# EAGLE board stacka4 (EAGLE 6.5.0)
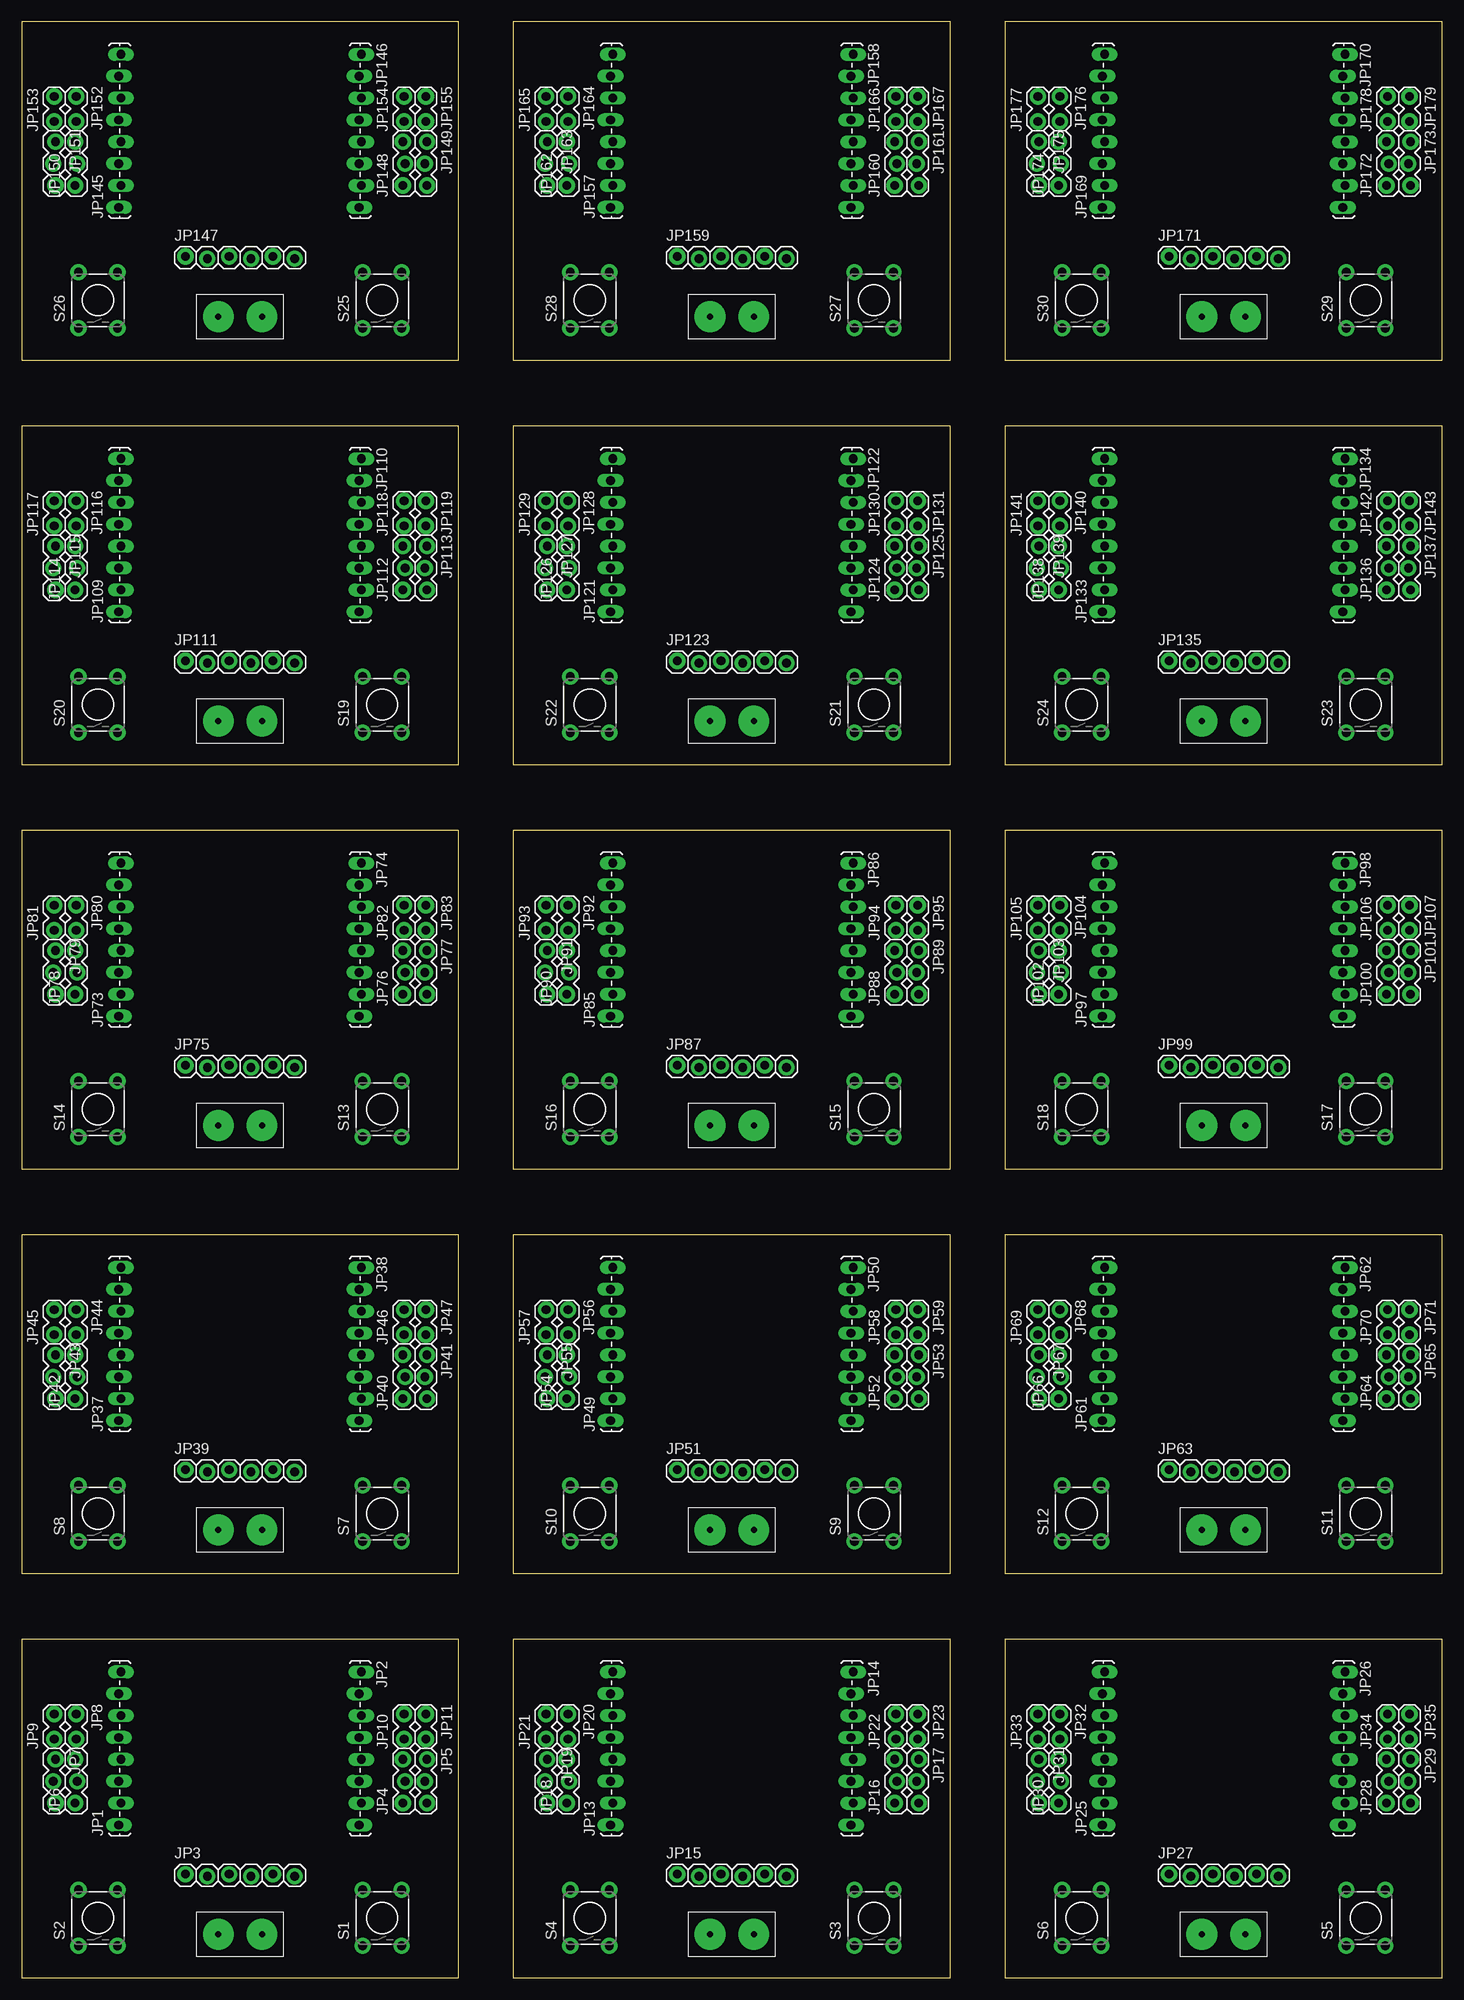
[diagram p0: board, top side]
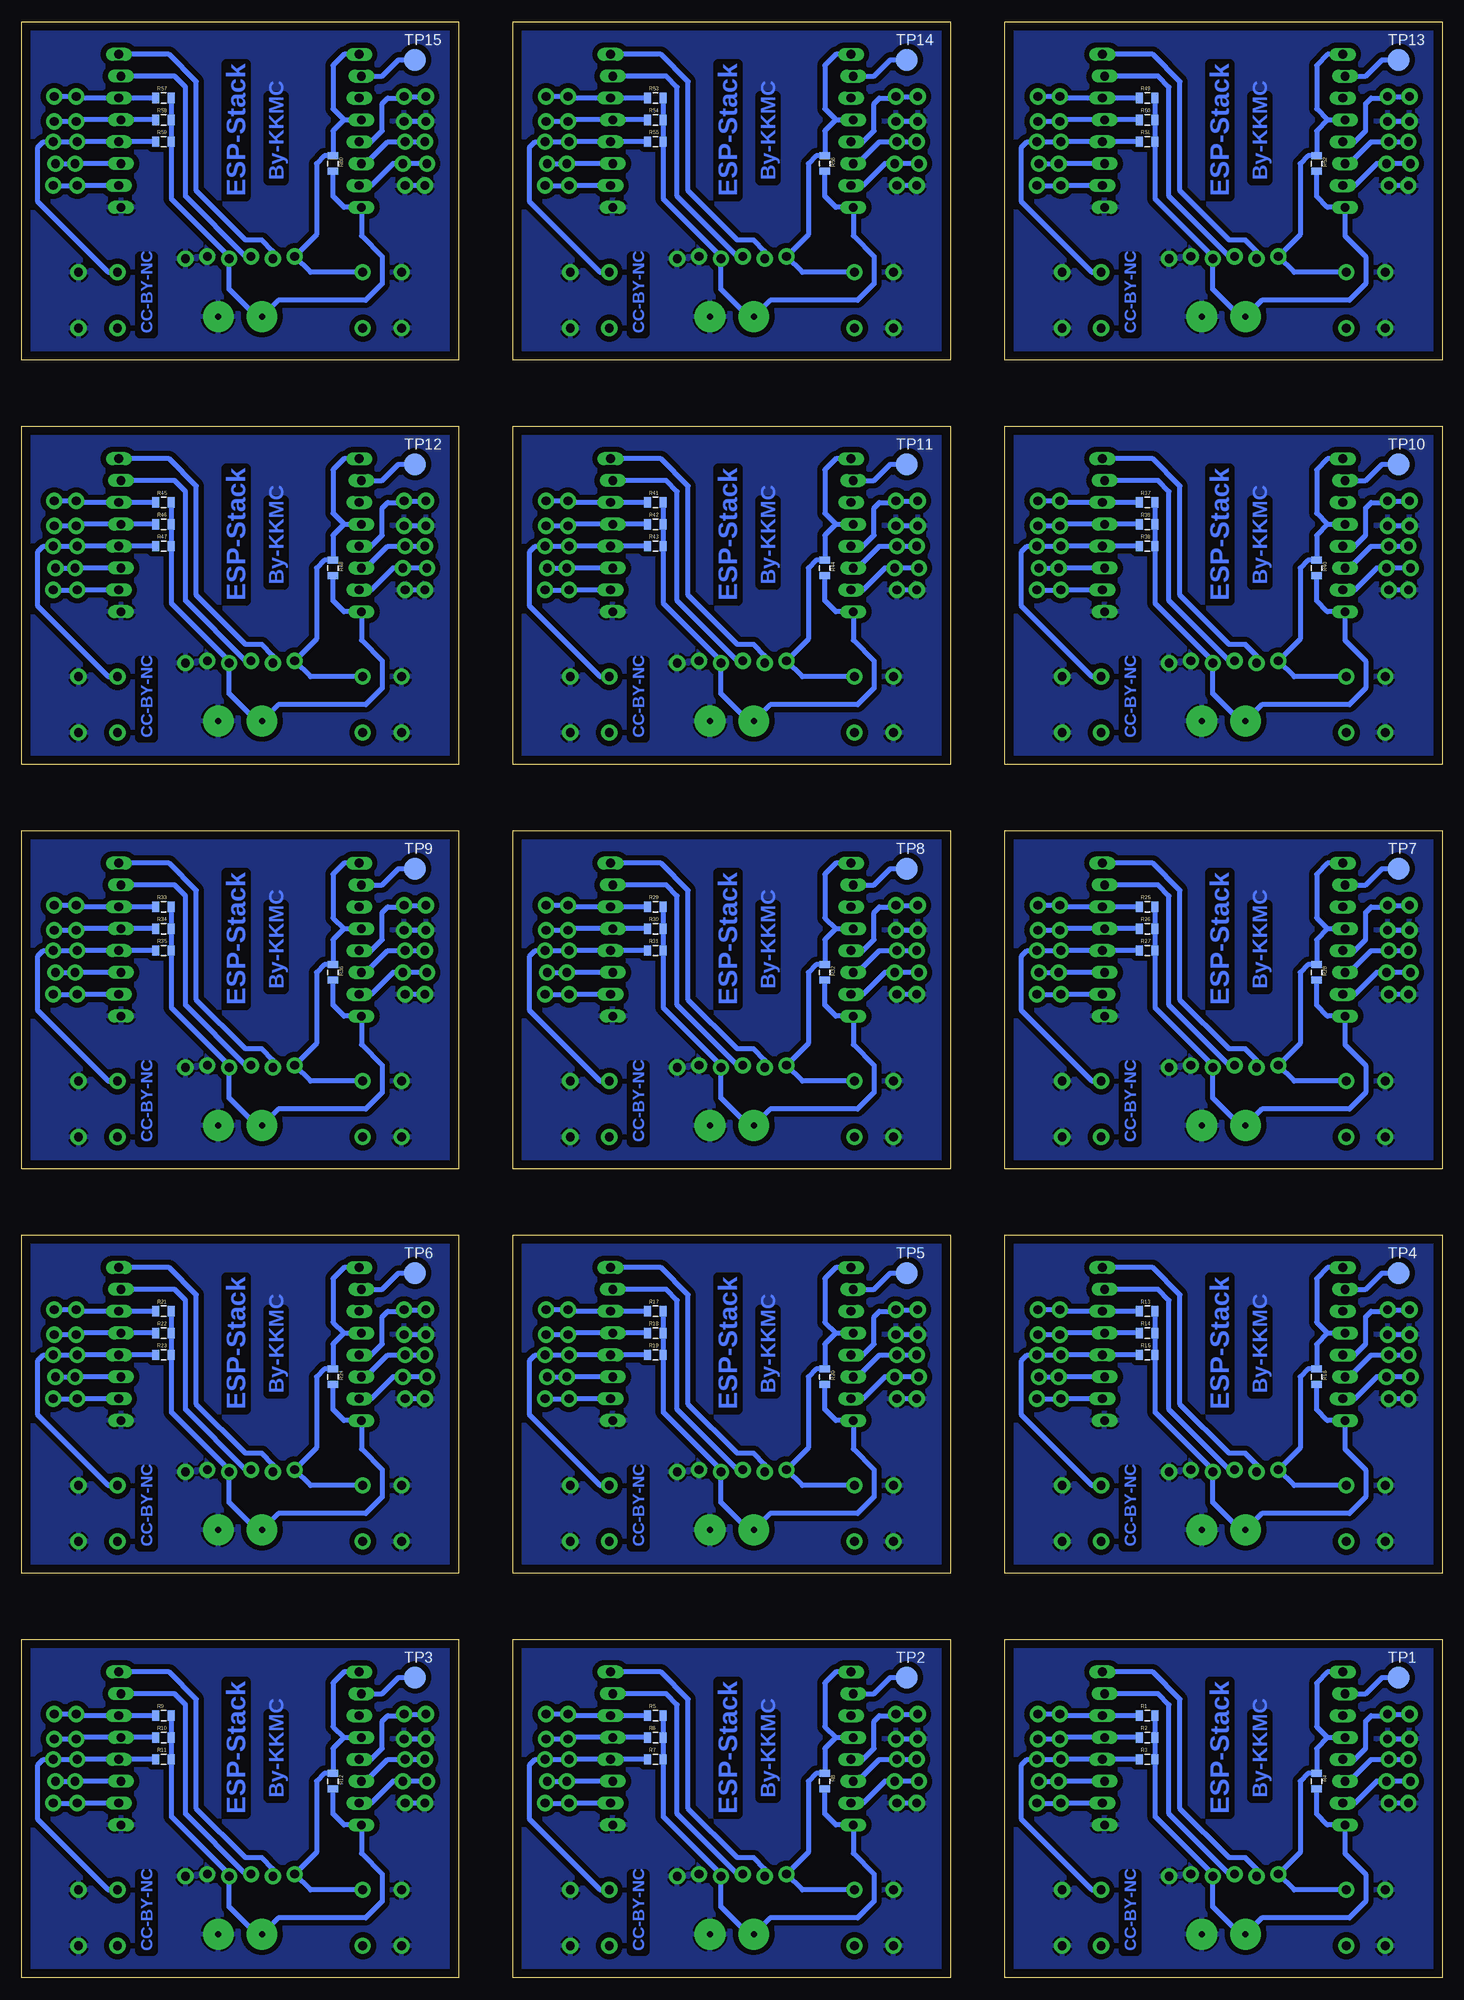
[diagram p1: board, bottom side, seen from below]

Size 165.1 x 227.33 mm. Coordinates in mm from the lower left corner, seen from the top.
Outline: 0,0 50.8,0 50.8,39.37 0,39.37 0,0
Outline: 57.15,0 107.95,0 107.95,39.37 57.15,39.37 57.15,0
Outline: 114.3,0 165.1,0 165.1,39.37 114.3,39.37 114.3,0
Outline: 0,46.99 50.8,46.99 50.8,86.36 0,86.36 0,46.99
Outline: 57.15,46.99 107.95,46.99 107.95,86.36 57.15,86.36 57.15,46.99
Outline: 114.3,46.99 165.1,46.99 165.1,86.36 114.3,86.36 114.3,46.99
Outline: 0,93.98 50.8,93.98 50.8,133.35 0,133.35 0,93.98
Outline: 57.15,93.98 107.95,93.98 107.95,133.35 57.15,133.35 57.15,93.98
Outline: 114.3,93.98 165.1,93.98 165.1,133.35 114.3,133.35 114.3,93.98
Outline: 0,140.97 50.8,140.97 50.8,180.34 0,180.34 0,140.97
Outline: 57.15,140.97 107.95,140.97 107.95,180.34 57.15,180.34 57.15,140.97
Outline: 114.3,140.97 165.1,140.97 165.1,180.34 114.3,180.34 114.3,140.97
Outline: 0,187.96 50.8,187.96 50.8,227.33 0,227.33 0,187.96
Outline: 57.15,187.96 107.95,187.96 107.95,227.33 57.15,227.33 57.15,187.96
Outline: 114.3,187.96 165.1,187.96 165.1,227.33 114.3,227.33 114.3,187.96
Copper layers (1*16): Top 0.035mm / dielectric 1.5mm / Bottom 0.035mm
Design rules "default": minimum track width 10mil, minimum drill 24mil, track to track 8mil, track to pad 8mil, pad to pad 8mil, via to via 8mil, smd to smd 8mil, copper to edge 40mil, drill to drill 8mil, minimum pad ring 10mil, minimum via ring 8mil, stop-mask expansion 4mil, vias tented up to drill 0mil, thermal gap 10mil

## Footprints (pad centres in the part's own frame; a part is rotated, then mirrored left to right if it is on the bottom)
1X08_LOCK_LONGPADS = drill 1.016 long: 1 0,0.127; 2 2.54,-0.127; 3 5.08,0.127; 4 7.62,-0.127; 5 10.16,0.127; 6 12.7,-0.127; 7 15.24,0.127; 8 17.78,-0.127
1X06_LOCK = drill 1.016 pad 1.88: 1 0,0; 2 2.54,-0.254; 3 5.08,0; 4 7.62,-0.254; 5 10.16,0; 6 12.7,-0.254
1X03_LOCK = drill 1.016 pad 1.88: 1 0,0.127; 2 2.54,-0.127; 3 5.08,0.127
1X02_LOCK = drill 1.016 pad 1.88: 1 -0.178,0; 2 2.718,0
1X02_XTRA_BIG = drill 0.7 pad 3.556: 1 -2.54,0; 2 2.54,0
0805 = smd 0.8 x 1.2: 1 -0.9,0; 2 0.9,0
TACTILE-PTH = drill 1.016 pad 1.88: 1 -3.251,2.261; 2 3.251,2.261; 3 -3.251,-2.261; 4 3.251,-2.261
B2,54 = smd 2.54 x 2.54: TP 0,0

## Placement (x,y rotation side)
E$1  [A4-35SC]  -8.26,-5.08 0 top  (outside the outline)
JP1  [1X08_LOCK_LONGPADS]  11.43,17.78 90 top
JP2  [1X08_LOCK_LONGPADS]  39.37,35.56 270 top
JP3  [1X06_LOCK]  19.05,12.06 0 top
JP4  [1X03_LOCK]  44.45,20.32 90 top
JP5  [1X03_LOCK]  46.99,25.4 270 top
JP6  [1X03_LOCK]  6.35,20.32 90 top
JP7  [1X03_LOCK]  3.81,25.4 270 top
JP8  M02LOCK  [1X02_LOCK]  6.35,30.48 270 top
JP9  M02LOCK  [1X02_LOCK]  3.81,27.94 90 top
JP10  M02LOCK  [1X02_LOCK]  44.45,27.94 90 top
JP11  M02LOCK  [1X02_LOCK]  46.99,30.48 270 top
JP12  M02PTH4  [1X02_XTRA_BIG]  25.4,5.08 0 top
JP13  [1X08_LOCK_LONGPADS]  68.58,17.78 90 top
JP14  [1X08_LOCK_LONGPADS]  96.52,35.56 270 top
JP15  [1X06_LOCK]  76.2,12.06 0 top
JP16  [1X03_LOCK]  101.6,20.32 90 top
JP17  [1X03_LOCK]  104.14,25.4 270 top
JP18  [1X03_LOCK]  63.5,20.32 90 top
JP19  [1X03_LOCK]  60.96,25.4 270 top
JP20  M02LOCK  [1X02_LOCK]  63.5,30.48 270 top
JP21  M02LOCK  [1X02_LOCK]  60.96,27.94 90 top
JP22  M02LOCK  [1X02_LOCK]  101.6,27.94 90 top
JP23  M02LOCK  [1X02_LOCK]  104.14,30.48 270 top
JP24  M02PTH4  [1X02_XTRA_BIG]  82.55,5.08 0 top
JP25  [1X08_LOCK_LONGPADS]  125.73,17.78 90 top
JP26  [1X08_LOCK_LONGPADS]  153.67,35.56 270 top
JP27  [1X06_LOCK]  133.35,12.06 0 top
JP28  [1X03_LOCK]  158.75,20.32 90 top
JP29  [1X03_LOCK]  161.29,25.4 270 top
JP30  [1X03_LOCK]  120.65,20.32 90 top
JP31  [1X03_LOCK]  118.11,25.4 270 top
JP32  M02LOCK  [1X02_LOCK]  120.65,30.48 270 top
JP33  M02LOCK  [1X02_LOCK]  118.11,27.94 90 top
JP34  M02LOCK  [1X02_LOCK]  158.75,27.94 90 top
JP35  M02LOCK  [1X02_LOCK]  161.29,30.48 270 top
JP36  M02PTH4  [1X02_XTRA_BIG]  139.7,5.08 0 top
JP37  [1X08_LOCK_LONGPADS]  11.43,64.77 90 top
JP38  [1X08_LOCK_LONGPADS]  39.37,82.55 270 top
JP39  [1X06_LOCK]  19.05,59.06 0 top
JP40  [1X03_LOCK]  44.45,67.31 90 top
JP41  [1X03_LOCK]  46.99,72.39 270 top
JP42  [1X03_LOCK]  6.35,67.31 90 top
JP43  [1X03_LOCK]  3.81,72.39 270 top
JP44  M02LOCK  [1X02_LOCK]  6.35,77.47 270 top
JP45  M02LOCK  [1X02_LOCK]  3.81,74.93 90 top
JP46  M02LOCK  [1X02_LOCK]  44.45,74.93 90 top
JP47  M02LOCK  [1X02_LOCK]  46.99,77.47 270 top
JP48  M02PTH4  [1X02_XTRA_BIG]  25.4,52.07 0 top
JP49  [1X08_LOCK_LONGPADS]  68.58,64.77 90 top
JP50  [1X08_LOCK_LONGPADS]  96.52,82.55 270 top
JP51  [1X06_LOCK]  76.2,59.06 0 top
JP52  [1X03_LOCK]  101.6,67.31 90 top
JP53  [1X03_LOCK]  104.14,72.39 270 top
JP54  [1X03_LOCK]  63.5,67.31 90 top
JP55  [1X03_LOCK]  60.96,72.39 270 top
JP56  M02LOCK  [1X02_LOCK]  63.5,77.47 270 top
JP57  M02LOCK  [1X02_LOCK]  60.96,74.93 90 top
JP58  M02LOCK  [1X02_LOCK]  101.6,74.93 90 top
JP59  M02LOCK  [1X02_LOCK]  104.14,77.47 270 top
JP60  M02PTH4  [1X02_XTRA_BIG]  82.55,52.07 0 top
JP61  [1X08_LOCK_LONGPADS]  125.73,64.77 90 top
JP62  [1X08_LOCK_LONGPADS]  153.67,82.55 270 top
JP63  [1X06_LOCK]  133.35,59.06 0 top
JP64  [1X03_LOCK]  158.75,67.31 90 top
JP65  [1X03_LOCK]  161.29,72.39 270 top
JP66  [1X03_LOCK]  120.65,67.31 90 top
JP67  [1X03_LOCK]  118.11,72.39 270 top
JP68  M02LOCK  [1X02_LOCK]  120.65,77.47 270 top
JP69  M02LOCK  [1X02_LOCK]  118.11,74.93 90 top
JP70  M02LOCK  [1X02_LOCK]  158.75,74.93 90 top
JP71  M02LOCK  [1X02_LOCK]  161.29,77.47 270 top
JP72  M02PTH4  [1X02_XTRA_BIG]  139.7,52.07 0 top
JP73  [1X08_LOCK_LONGPADS]  11.43,111.76 90 top
JP74  [1X08_LOCK_LONGPADS]  39.37,129.54 270 top
JP75  [1X06_LOCK]  19.05,106.05 0 top
JP76  [1X03_LOCK]  44.45,114.3 90 top
JP77  [1X03_LOCK]  46.99,119.38 270 top
JP78  [1X03_LOCK]  6.35,114.3 90 top
JP79  [1X03_LOCK]  3.81,119.38 270 top
JP80  M02LOCK  [1X02_LOCK]  6.35,124.46 270 top
JP81  M02LOCK  [1X02_LOCK]  3.81,121.92 90 top
JP82  M02LOCK  [1X02_LOCK]  44.45,121.92 90 top
JP83  M02LOCK  [1X02_LOCK]  46.99,124.46 270 top
JP84  M02PTH4  [1X02_XTRA_BIG]  25.4,99.06 0 top
JP85  [1X08_LOCK_LONGPADS]  68.58,111.76 90 top
JP86  [1X08_LOCK_LONGPADS]  96.52,129.54 270 top
JP87  [1X06_LOCK]  76.2,106.05 0 top
JP88  [1X03_LOCK]  101.6,114.3 90 top
JP89  [1X03_LOCK]  104.14,119.38 270 top
JP90  [1X03_LOCK]  63.5,114.3 90 top
JP91  [1X03_LOCK]  60.96,119.38 270 top
JP92  M02LOCK  [1X02_LOCK]  63.5,124.46 270 top
JP93  M02LOCK  [1X02_LOCK]  60.96,121.92 90 top
JP94  M02LOCK  [1X02_LOCK]  101.6,121.92 90 top
JP95  M02LOCK  [1X02_LOCK]  104.14,124.46 270 top
JP96  M02PTH4  [1X02_XTRA_BIG]  82.55,99.06 0 top
JP97  [1X08_LOCK_LONGPADS]  125.73,111.76 90 top
JP98  [1X08_LOCK_LONGPADS]  153.67,129.54 270 top
JP99  [1X06_LOCK]  133.35,106.05 0 top
JP100  [1X03_LOCK]  158.75,114.3 90 top
JP101  [1X03_LOCK]  161.29,119.38 270 top
JP102  [1X03_LOCK]  120.65,114.3 90 top
JP103  [1X03_LOCK]  118.11,119.38 270 top
JP104  M02LOCK  [1X02_LOCK]  120.65,124.46 270 top
JP105  M02LOCK  [1X02_LOCK]  118.11,121.92 90 top
JP106  M02LOCK  [1X02_LOCK]  158.75,121.92 90 top
JP107  M02LOCK  [1X02_LOCK]  161.29,124.46 270 top
JP108  M02PTH4  [1X02_XTRA_BIG]  139.7,99.06 0 top
JP109  [1X08_LOCK_LONGPADS]  11.43,158.75 90 top
JP110  [1X08_LOCK_LONGPADS]  39.37,176.53 270 top
JP111  [1X06_LOCK]  19.05,153.03 0 top
JP112  [1X03_LOCK]  44.45,161.29 90 top
JP113  [1X03_LOCK]  46.99,166.37 270 top
JP114  [1X03_LOCK]  6.35,161.29 90 top
JP115  [1X03_LOCK]  3.81,166.37 270 top
JP116  M02LOCK  [1X02_LOCK]  6.35,171.45 270 top
JP117  M02LOCK  [1X02_LOCK]  3.81,168.91 90 top
JP118  M02LOCK  [1X02_LOCK]  44.45,168.91 90 top
JP119  M02LOCK  [1X02_LOCK]  46.99,171.45 270 top
JP120  M02PTH4  [1X02_XTRA_BIG]  25.4,146.05 0 top
JP121  [1X08_LOCK_LONGPADS]  68.58,158.75 90 top
JP122  [1X08_LOCK_LONGPADS]  96.52,176.53 270 top
JP123  [1X06_LOCK]  76.2,153.03 0 top
JP124  [1X03_LOCK]  101.6,161.29 90 top
JP125  [1X03_LOCK]  104.14,166.37 270 top
JP126  [1X03_LOCK]  63.5,161.29 90 top
JP127  [1X03_LOCK]  60.96,166.37 270 top
JP128  M02LOCK  [1X02_LOCK]  63.5,171.45 270 top
JP129  M02LOCK  [1X02_LOCK]  60.96,168.91 90 top
JP130  M02LOCK  [1X02_LOCK]  101.6,168.91 90 top
JP131  M02LOCK  [1X02_LOCK]  104.14,171.45 270 top
JP132  M02PTH4  [1X02_XTRA_BIG]  82.55,146.05 0 top
JP133  [1X08_LOCK_LONGPADS]  125.73,158.75 90 top
JP134  [1X08_LOCK_LONGPADS]  153.67,176.53 270 top
JP135  [1X06_LOCK]  133.35,153.03 0 top
JP136  [1X03_LOCK]  158.75,161.29 90 top
JP137  [1X03_LOCK]  161.29,166.37 270 top
JP138  [1X03_LOCK]  120.65,161.29 90 top
JP139  [1X03_LOCK]  118.11,166.37 270 top
JP140  M02LOCK  [1X02_LOCK]  120.65,171.45 270 top
JP141  M02LOCK  [1X02_LOCK]  118.11,168.91 90 top
JP142  M02LOCK  [1X02_LOCK]  158.75,168.91 90 top
JP143  M02LOCK  [1X02_LOCK]  161.29,171.45 270 top
JP144  M02PTH4  [1X02_XTRA_BIG]  139.7,146.05 0 top
JP145  [1X08_LOCK_LONGPADS]  11.43,205.74 90 top
JP146  [1X08_LOCK_LONGPADS]  39.37,223.52 270 top
JP147  [1X06_LOCK]  19.05,200.02 0 top
JP148  [1X03_LOCK]  44.45,208.28 90 top
JP149  [1X03_LOCK]  46.99,213.36 270 top
JP150  [1X03_LOCK]  6.35,208.28 90 top
JP151  [1X03_LOCK]  3.81,213.36 270 top
JP152  M02LOCK  [1X02_LOCK]  6.35,218.44 270 top
JP153  M02LOCK  [1X02_LOCK]  3.81,215.9 90 top
JP154  M02LOCK  [1X02_LOCK]  44.45,215.9 90 top
JP155  M02LOCK  [1X02_LOCK]  46.99,218.44 270 top
JP156  M02PTH4  [1X02_XTRA_BIG]  25.4,193.04 0 top
JP157  [1X08_LOCK_LONGPADS]  68.58,205.74 90 top
JP158  [1X08_LOCK_LONGPADS]  96.52,223.52 270 top
JP159  [1X06_LOCK]  76.2,200.02 0 top
JP160  [1X03_LOCK]  101.6,208.28 90 top
JP161  [1X03_LOCK]  104.14,213.36 270 top
JP162  [1X03_LOCK]  63.5,208.28 90 top
JP163  [1X03_LOCK]  60.96,213.36 270 top
JP164  M02LOCK  [1X02_LOCK]  63.5,218.44 270 top
JP165  M02LOCK  [1X02_LOCK]  60.96,215.9 90 top
JP166  M02LOCK  [1X02_LOCK]  101.6,215.9 90 top
JP167  M02LOCK  [1X02_LOCK]  104.14,218.44 270 top
JP168  M02PTH4  [1X02_XTRA_BIG]  82.55,193.04 0 top
JP169  [1X08_LOCK_LONGPADS]  125.73,205.74 90 top
JP170  [1X08_LOCK_LONGPADS]  153.67,223.52 270 top
JP171  [1X06_LOCK]  133.35,200.02 0 top
JP172  [1X03_LOCK]  158.75,208.28 90 top
JP173  [1X03_LOCK]  161.29,213.36 270 top
JP174  [1X03_LOCK]  120.65,208.28 90 top
JP175  [1X03_LOCK]  118.11,213.36 270 top
JP176  M02LOCK  [1X02_LOCK]  120.65,218.44 270 top
JP177  M02LOCK  [1X02_LOCK]  118.11,215.9 90 top
JP178  M02LOCK  [1X02_LOCK]  158.75,215.9 90 top
JP179  M02LOCK  [1X02_LOCK]  161.29,218.44 270 top
JP180  M02PTH4  [1X02_XTRA_BIG]  139.7,193.04 0 top
R1  [0805]  34.29,30.48 0 bottom
R2  [0805]  34.29,27.94 0 bottom
R3  [0805]  34.29,25.4 0 bottom
R4  [0805]  14.6,22.86 270 bottom
R5  [0805]  91.44,30.48 0 bottom
R6  [0805]  91.44,27.94 0 bottom
R7  [0805]  91.44,25.4 0 bottom
R8  [0805]  71.76,22.86 270 bottom
R9  [0805]  148.59,30.48 0 bottom
R10  [0805]  148.59,27.94 0 bottom
R11  [0805]  148.59,25.4 0 bottom
R12  [0805]  128.91,22.86 270 bottom
R13  [0805]  34.29,77.47 0 bottom
R14  [0805]  34.29,74.93 0 bottom
R15  [0805]  34.29,72.39 0 bottom
R16  [0805]  14.6,69.85 270 bottom
R17  [0805]  91.44,77.47 0 bottom
R18  [0805]  91.44,74.93 0 bottom
R19  [0805]  91.44,72.39 0 bottom
R20  [0805]  71.76,69.85 270 bottom
R21  [0805]  148.59,77.47 0 bottom
R22  [0805]  148.59,74.93 0 bottom
R23  [0805]  148.59,72.39 0 bottom
R24  [0805]  128.91,69.85 270 bottom
R25  [0805]  34.29,124.46 0 bottom
R26  [0805]  34.29,121.92 0 bottom
R27  [0805]  34.29,119.38 0 bottom
R28  [0805]  14.6,116.84 270 bottom
R29  [0805]  91.44,124.46 0 bottom
R30  [0805]  91.44,121.92 0 bottom
R31  [0805]  91.44,119.38 0 bottom
R32  [0805]  71.76,116.84 270 bottom
R33  [0805]  148.59,124.46 0 bottom
R34  [0805]  148.59,121.92 0 bottom
R35  [0805]  148.59,119.38 0 bottom
R36  [0805]  128.91,116.84 270 bottom
R37  [0805]  34.29,171.45 0 bottom
R38  [0805]  34.29,168.91 0 bottom
R39  [0805]  34.29,166.37 0 bottom
R40  [0805]  14.6,163.83 270 bottom
R41  [0805]  91.44,171.45 0 bottom
R42  [0805]  91.44,168.91 0 bottom
R43  [0805]  91.44,166.37 0 bottom
R44  [0805]  71.76,163.83 270 bottom
R45  [0805]  148.59,171.45 0 bottom
R46  [0805]  148.59,168.91 0 bottom
R47  [0805]  148.59,166.37 0 bottom
R48  [0805]  128.91,163.83 270 bottom
R49  [0805]  34.29,218.44 0 bottom
R50  [0805]  34.29,215.9 0 bottom
R51  [0805]  34.29,213.36 0 bottom
R52  [0805]  14.6,210.82 270 bottom
R53  [0805]  91.44,218.44 0 bottom
R54  [0805]  91.44,215.9 0 bottom
R55  [0805]  91.44,213.36 0 bottom
R56  [0805]  71.76,210.82 270 bottom
R57  [0805]  148.59,218.44 0 bottom
R58  [0805]  148.59,215.9 0 bottom
R59  [0805]  148.59,213.36 0 bottom
R60  [0805]  128.91,210.82 270 bottom
S1  [TACTILE-PTH]  41.91,6.98 90 top
S2  [TACTILE-PTH]  8.89,6.98 90 top
S3  [TACTILE-PTH]  99.06,6.98 90 top
S4  [TACTILE-PTH]  66.04,6.98 90 top
S5  [TACTILE-PTH]  156.21,6.98 90 top
S6  [TACTILE-PTH]  123.19,6.98 90 top
S7  [TACTILE-PTH]  41.91,53.98 90 top
S8  [TACTILE-PTH]  8.89,53.98 90 top
S9  [TACTILE-PTH]  99.06,53.98 90 top
S10  [TACTILE-PTH]  66.04,53.98 90 top
S11  [TACTILE-PTH]  156.21,53.98 90 top
S12  [TACTILE-PTH]  123.19,53.98 90 top
S13  [TACTILE-PTH]  41.91,100.97 90 top
S14  [TACTILE-PTH]  8.89,100.97 90 top
S15  [TACTILE-PTH]  99.06,100.97 90 top
S16  [TACTILE-PTH]  66.04,100.97 90 top
S17  [TACTILE-PTH]  156.21,100.97 90 top
S18  [TACTILE-PTH]  123.19,100.97 90 top
S19  [TACTILE-PTH]  41.91,147.95 90 top
S20  [TACTILE-PTH]  8.89,147.95 90 top
S21  [TACTILE-PTH]  99.06,147.95 90 top
S22  [TACTILE-PTH]  66.04,147.95 90 top
S23  [TACTILE-PTH]  156.21,147.95 90 top
S24  [TACTILE-PTH]  123.19,147.95 90 top
S25  [TACTILE-PTH]  41.91,194.94 90 top
S26  [TACTILE-PTH]  8.89,194.94 90 top
S27  [TACTILE-PTH]  99.06,194.94 90 top
S28  [TACTILE-PTH]  66.04,194.94 90 top
S29  [TACTILE-PTH]  156.21,194.94 90 top
S30  [TACTILE-PTH]  123.19,194.94 90 top
TP1  TPB2,54  [B2,54]  5.08,34.93 0 bottom
TP2  TPB2,54  [B2,54]  62.23,34.93 0 bottom
TP3  TPB2,54  [B2,54]  119.38,34.93 0 bottom
TP4  TPB2,54  [B2,54]  5.08,81.92 0 bottom
TP5  TPB2,54  [B2,54]  62.23,81.92 0 bottom
TP6  TPB2,54  [B2,54]  119.38,81.92 0 bottom
TP7  TPB2,54  [B2,54]  5.08,128.91 0 bottom
TP8  TPB2,54  [B2,54]  62.23,128.91 0 bottom
TP9  TPB2,54  [B2,54]  119.38,128.91 0 bottom
TP10  TPB2,54  [B2,54]  5.08,175.89 0 bottom
TP11  TPB2,54  [B2,54]  62.23,175.89 0 bottom
TP12  TPB2,54  [B2,54]  119.38,175.89 0 bottom
TP13  TPB2,54  [B2,54]  5.08,222.88 0 bottom
TP14  TPB2,54  [B2,54]  62.23,222.88 0 bottom
TP15  TPB2,54  [B2,54]  119.38,222.88 0 bottom

## Library data of the parts
E$1 = frames
JP1-JP180 = SparkFun-Connectors
R1-R60 = SparkFun-Passives
S1-S30 = SparkFun-Electromechanical
TP1-TP15 = testpad

## Nets
ADC: JP1.7 TP1.TP
ADC1: JP13.7 TP2.TP
ADC2: JP25.7 TP3.TP
ADC3: JP37.7 TP4.TP
ADC4: JP49.7 TP5.TP
ADC5: JP61.7 TP6.TP
ADC6: JP73.7 TP7.TP
ADC7: JP85.7 TP8.TP
ADC8: JP97.7 TP9.TP
ADC9: JP109.7 TP10.TP
ADC10: JP121.7 TP11.TP
ADC11: JP133.7 TP12.TP
ADC12: JP145.7 TP13.TP
ADC13: JP157.7 TP14.TP
ADC14: JP169.7 TP15.TP
CH_PD: JP1.6
CH_PD1: JP13.6
CH_PD2: JP25.6
CH_PD3: JP37.6
CH_PD4: JP49.6
CH_PD5: JP61.6
CH_PD6: JP73.6
CH_PD7: JP85.6
CH_PD8: JP97.6
CH_PD9: JP109.6
CH_PD10: JP121.6
CH_PD11: JP133.6
CH_PD12: JP145.6
CH_PD13: JP157.6
CH_PD14: JP169.6
GND: JP2.8 JP3.5 JP3.6 JP6.1 JP7.3 JP8.2 JP9.1 JP12.2 S1.3 S1.4 S2.1 S2.2
GND1: JP14.8 JP15.5 JP15.6 JP18.1 JP19.3 JP20.2 JP21.1 JP24.2 S3.3 S3.4 S4.1 S4.2
GND2: JP26.8 JP27.5 JP27.6 JP30.1 JP31.3 JP32.2 JP33.1 JP36.2 S5.3 S5.4 S6.1 S6.2
GND3: JP38.8 JP39.5 JP39.6 JP42.1 JP43.3 JP44.2 JP45.1 JP48.2 S7.3 S7.4 S8.1 S8.2
GND4: JP50.8 JP51.5 JP51.6 JP54.1 JP55.3 JP56.2 JP57.1 JP60.2 S9.3 S9.4 S10.1 S10.2
GND5: JP62.8 JP63.5 JP63.6 JP66.1 JP67.3 JP68.2 JP69.1 JP72.2 S11.3 S11.4 S12.1 S12.2
GND6: JP74.8 JP75.5 JP75.6 JP78.1 JP79.3 JP80.2 JP81.1 JP84.2 S13.3 S13.4 S14.1 S14.2
GND7: JP86.8 JP87.5 JP87.6 JP90.1 JP91.3 JP92.2 JP93.1 JP96.2 S15.3 S15.4 S16.1 S16.2
GND8: JP98.8 JP99.5 JP99.6 JP102.1 JP103.3 JP104.2 JP105.1 JP108.2 S17.3 S17.4 S18.1 S18.2
GND9: JP110.8 JP111.5 JP111.6 JP114.1 JP115.3 JP116.2 JP117.1 JP120.2 S19.3 S19.4 S20.1 S20.2
GND10: JP122.8 JP123.5 JP123.6 JP126.1 JP127.3 JP128.2 JP129.1 JP132.2 S21.3 S21.4 S22.1 S22.2
GND11: JP134.8 JP135.5 JP135.6 JP138.1 JP139.3 JP140.2 JP141.1 JP144.2 S23.3 S23.4 S24.1 S24.2
GND12: JP146.8 JP147.5 JP147.6 JP150.1 JP151.3 JP152.2 JP153.1 JP156.2 S25.3 S25.4 S26.1 S26.2
GND13: JP158.8 JP159.5 JP159.6 JP162.1 JP163.3 JP164.2 JP165.1 JP168.2 S27.3 S27.4 S28.1 S28.2
GND14: JP170.8 JP171.5 JP171.6 JP174.1 JP175.3 JP176.2 JP177.1 JP180.2 S29.3 S29.4 S30.1 S30.2
GPIO0: JP2.5 JP4.3 JP5.1 R3.1 S1.2
GPIO1: JP13.4 JP20.1 JP21.2
GPIO2: JP2.6 JP4.2 JP5.2
GPIO3: JP13.3 JP18.3 JP19.1
GPIO4: JP2.4 JP10.1 JP11.2 R2.1
GPIO5: JP2.3 JP10.2 JP11.1 R1.1
GPIO6: JP13.2 JP18.2 JP19.2
GPIO7: JP14.7 JP16.1 JP17.3
GPIO8: JP14.6 JP16.2 JP17.2
GPIO9: JP14.5 JP16.3 JP17.1 R7.1 S3.2
GPIO10: JP14.4 JP22.1 JP23.2 R6.1
GPIO11: JP14.3 JP22.2 JP23.1 R5.1
GPIO12: JP1.3 JP6.3 JP7.1
GPIO13: JP1.2 JP6.2 JP7.2
GPIO14: JP1.4 JP8.1 JP9.2
GPIO15: JP2.7 JP4.1 JP5.3
GPIO16: JP25.4 JP32.1 JP33.2
GPIO17: JP25.3 JP30.3 JP31.1
GPIO18: JP25.2 JP30.2 JP31.2
GPIO19: JP26.7 JP28.1 JP29.3
GPIO20: JP26.6 JP28.2 JP29.2
GPIO21: JP26.5 JP28.3 JP29.1 R11.1 S5.2
GPIO22: JP26.4 JP34.1 JP35.2 R10.1
GPIO23: JP26.3 JP34.2 JP35.1 R9.1
GPIO24: JP37.4 JP44.1 JP45.2
GPIO25: JP37.3 JP42.3 JP43.1
GPIO26: JP37.2 JP42.2 JP43.2
GPIO27: JP38.7 JP40.1 JP41.3
GPIO28: JP38.6 JP40.2 JP41.2
GPIO29: JP38.5 JP40.3 JP41.1 R15.1 S7.2
GPIO30: JP38.4 JP46.1 JP47.2 R14.1
GPIO31: JP38.3 JP46.2 JP47.1 R13.1
GPIO32: JP49.4 JP56.1 JP57.2
GPIO33: JP49.3 JP54.3 JP55.1
GPIO34: JP49.2 JP54.2 JP55.2
GPIO35: JP50.7 JP52.1 JP53.3
GPIO36: JP50.6 JP52.2 JP53.2
GPIO37: JP50.5 JP52.3 JP53.1 R19.1 S9.2
GPIO38: JP50.4 JP58.1 JP59.2 R18.1
GPIO39: JP50.3 JP58.2 JP59.1 R17.1
GPIO40: JP61.4 JP68.1 JP69.2
GPIO41: JP61.3 JP66.3 JP67.1
GPIO42: JP61.2 JP66.2 JP67.2
GPIO43: JP62.7 JP64.1 JP65.3
GPIO44: JP62.6 JP64.2 JP65.2
GPIO45: JP62.5 JP64.3 JP65.1 R23.1 S11.2
GPIO46: JP62.4 JP70.1 JP71.2 R22.1
GPIO47: JP62.3 JP70.2 JP71.1 R21.1
GPIO48: JP73.4 JP80.1 JP81.2
GPIO49: JP73.3 JP78.3 JP79.1
GPIO50: JP73.2 JP78.2 JP79.2
GPIO51: JP74.7 JP76.1 JP77.3
GPIO52: JP74.6 JP76.2 JP77.2
GPIO53: JP74.5 JP76.3 JP77.1 R27.1 S13.2
GPIO54: JP74.4 JP82.1 JP83.2 R26.1
GPIO55: JP74.3 JP82.2 JP83.1 R25.1
GPIO56: JP85.4 JP92.1 JP93.2
GPIO57: JP85.3 JP90.3 JP91.1
GPIO58: JP85.2 JP90.2 JP91.2
GPIO59: JP86.7 JP88.1 JP89.3
GPIO60: JP86.6 JP88.2 JP89.2
GPIO61: JP86.5 JP88.3 JP89.1 R31.1 S15.2
GPIO62: JP86.4 JP94.1 JP95.2 R30.1
GPIO63: JP86.3 JP94.2 JP95.1 R29.1
GPIO64: JP97.4 JP104.1 JP105.2
GPIO65: JP97.3 JP102.3 JP103.1
GPIO66: JP97.2 JP102.2 JP103.2
GPIO67: JP98.7 JP100.1 JP101.3
GPIO68: JP98.6 JP100.2 JP101.2
GPIO69: JP98.5 JP100.3 JP101.1 R35.1 S17.2
GPIO70: JP98.4 JP106.1 JP107.2 R34.1
GPIO71: JP98.3 JP106.2 JP107.1 R33.1
GPIO72: JP109.4 JP116.1 JP117.2
GPIO73: JP109.3 JP114.3 JP115.1
GPIO74: JP109.2 JP114.2 JP115.2
GPIO75: JP110.7 JP112.1 JP113.3
GPIO76: JP110.6 JP112.2 JP113.2
GPIO77: JP110.5 JP112.3 JP113.1 R39.1 S19.2
GPIO78: JP110.4 JP118.1 JP119.2 R38.1
GPIO79: JP110.3 JP118.2 JP119.1 R37.1
GPIO80: JP121.4 JP128.1 JP129.2
GPIO81: JP121.3 JP126.3 JP127.1
GPIO82: JP121.2 JP126.2 JP127.2
GPIO83: JP122.7 JP124.1 JP125.3
GPIO84: JP122.6 JP124.2 JP125.2
GPIO85: JP122.5 JP124.3 JP125.1 R43.1 S21.2
GPIO86: JP122.4 JP130.1 JP131.2 R42.1
GPIO87: JP122.3 JP130.2 JP131.1 R41.1
GPIO88: JP133.4 JP140.1 JP141.2
GPIO89: JP133.3 JP138.3 JP139.1
GPIO90: JP133.2 JP138.2 JP139.2
GPIO91: JP134.7 JP136.1 JP137.3
GPIO92: JP134.6 JP136.2 JP137.2
GPIO93: JP134.5 JP136.3 JP137.1 R47.1 S23.2
GPIO94: JP134.4 JP142.1 JP143.2 R46.1
GPIO95: JP134.3 JP142.2 JP143.1 R45.1
GPIO96: JP145.4 JP152.1 JP153.2
GPIO97: JP145.3 JP150.3 JP151.1
GPIO98: JP145.2 JP150.2 JP151.2
GPIO99: JP146.7 JP148.1 JP149.3
GPIO100: JP146.6 JP148.2 JP149.2
GPIO101: JP146.5 JP148.3 JP149.1 R51.1 S25.2
GPIO102: JP146.4 JP154.1 JP155.2 R50.1
GPIO103: JP146.3 JP154.2 JP155.1 R49.1
GPIO104: JP157.4 JP164.1 JP165.2
GPIO105: JP157.3 JP162.3 JP163.1
GPIO106: JP157.2 JP162.2 JP163.2
GPIO107: JP158.7 JP160.1 JP161.3
GPIO108: JP158.6 JP160.2 JP161.2
GPIO109: JP158.5 JP160.3 JP161.1 R55.1 S27.2
GPIO110: JP158.4 JP166.1 JP167.2 R54.1
GPIO111: JP158.3 JP166.2 JP167.1 R53.1
GPIO112: JP169.4 JP176.1 JP177.2
GPIO113: JP169.3 JP174.3 JP175.1
GPIO114: JP169.2 JP174.2 JP175.2
GPIO115: JP170.7 JP172.1 JP173.3
GPIO116: JP170.6 JP172.2 JP173.2
GPIO117: JP170.5 JP172.3 JP173.1 R59.1 S29.2
GPIO118: JP170.4 JP178.1 JP179.2 R58.1
GPIO119: JP170.3 JP178.2 JP179.1 R57.1
REST: JP1.5 JP1.8 JP3.1 R4.1 S2.4
REST1: JP13.5 JP13.8 JP15.1 R8.1 S4.4
REST2: JP25.5 JP25.8 JP27.1 R12.1 S6.4
REST3: JP37.5 JP37.8 JP39.1 R16.1 S8.4
REST4: JP49.5 JP49.8 JP51.1 R20.1 S10.4
REST5: JP61.5 JP61.8 JP63.1 R24.1 S12.4
REST6: JP73.5 JP73.8 JP75.1 R28.1 S14.4
REST7: JP85.5 JP85.8 JP87.1 R32.1 S16.4
REST8: JP97.5 JP97.8 JP99.1 R36.1 S18.4
REST9: JP109.5 JP109.8 JP111.1 R40.1 S20.4
REST10: JP121.5 JP121.8 JP123.1 R44.1 S22.4
REST11: JP133.5 JP133.8 JP135.1 R48.1 S24.4
REST12: JP145.5 JP145.8 JP147.1 R52.1 S26.4
REST13: JP157.5 JP157.8 JP159.1 R56.1 S28.4
REST14: JP169.5 JP169.8 JP171.1 R60.1 S30.4
RXD: JP2.2 JP3.3
RXD1: JP14.2 JP15.3
RXD2: JP26.2 JP27.3
RXD3: JP38.2 JP39.3
RXD4: JP50.2 JP51.3
RXD5: JP62.2 JP63.3
RXD6: JP74.2 JP75.3
RXD7: JP86.2 JP87.3
RXD8: JP98.2 JP99.3
RXD9: JP110.2 JP111.3
RXD10: JP122.2 JP123.3
RXD11: JP134.2 JP135.3
RXD12: JP146.2 JP147.3
RXD13: JP158.2 JP159.3
RXD14: JP170.2 JP171.3
TXD: JP2.1 JP3.2
TXD1: JP14.1 JP15.2
TXD2: JP26.1 JP27.2
TXD3: JP38.1 JP39.2
TXD4: JP50.1 JP51.2
TXD5: JP62.1 JP63.2
TXD6: JP74.1 JP75.2
TXD7: JP86.1 JP87.2
TXD8: JP98.1 JP99.2
TXD9: JP110.1 JP111.2
TXD10: JP122.1 JP123.2
TXD11: JP134.1 JP135.2
TXD12: JP146.1 JP147.2
TXD13: JP158.1 JP159.2
TXD14: JP170.1 JP171.2
VCC: JP1.1 JP3.4 JP12.1 R1.2 R2.2 R3.2 R4.2
VCC1: JP13.1 JP15.4 JP24.1 R5.2 R6.2 R7.2 R8.2
VCC2: JP25.1 JP27.4 JP36.1 R9.2 R10.2 R11.2 R12.2
VCC3: JP37.1 JP39.4 JP48.1 R13.2 R14.2 R15.2 R16.2
VCC4: JP49.1 JP51.4 JP60.1 R17.2 R18.2 R19.2 R20.2
VCC5: JP61.1 JP63.4 JP72.1 R21.2 R22.2 R23.2 R24.2
VCC6: JP73.1 JP75.4 JP84.1 R25.2 R26.2 R27.2 R28.2
VCC7: JP85.1 JP87.4 JP96.1 R29.2 R30.2 R31.2 R32.2
VCC8: JP97.1 JP99.4 JP108.1 R33.2 R34.2 R35.2 R36.2
VCC9: JP109.1 JP111.4 JP120.1 R37.2 R38.2 R39.2 R40.2
VCC10: JP121.1 JP123.4 JP132.1 R41.2 R42.2 R43.2 R44.2
VCC11: JP133.1 JP135.4 JP144.1 R45.2 R46.2 R47.2 R48.2
VCC12: JP145.1 JP147.4 JP156.1 R49.2 R50.2 R51.2 R52.2
VCC13: JP157.1 JP159.4 JP168.1 R53.2 R54.2 R55.2 R56.2
VCC14: JP169.1 JP171.4 JP180.1 R57.2 R58.2 R59.2 R60.2

## Tracks (layer width: path | path; a pad name or v marks a point on that pad's centre or on a via)
ADC
  Bottom 0.61: JP1.7 8.89,33.02 6.98,34.93 TP1.TP
ADC1
  Bottom 0.61: JP13.7 66.04,33.02 64.14,34.93 TP2.TP
ADC2
  Bottom 0.61: JP25.7 123.19,33.02 121.28,34.93 TP3.TP
ADC3
  Bottom 0.61: JP37.7 8.89,80.01 6.98,81.92 TP4.TP
ADC4
  Bottom 0.61: JP49.7 66.04,80.01 64.14,81.92 TP5.TP
ADC5
  Bottom 0.61: JP61.7 123.19,80.01 121.28,81.92 TP6.TP
ADC6
  Bottom 0.61: JP73.7 8.89,127 6.98,128.91 TP7.TP
ADC7
  Bottom 0.61: JP85.7 66.04,127 64.14,128.91 TP8.TP
ADC8
  Bottom 0.61: JP97.7 123.19,127 121.28,128.91 TP9.TP
ADC9
  Bottom 0.61: JP109.7 8.89,173.99 6.98,175.89 TP10.TP
ADC10
  Bottom 0.61: JP121.7 66.04,173.99 64.14,175.89 TP11.TP
ADC11
  Bottom 0.61: JP133.7 123.19,173.99 121.28,175.89 TP12.TP
ADC12
  Bottom 0.61: JP145.7 8.89,220.98 6.98,222.88 TP13.TP
ADC13
  Bottom 0.61: JP157.7 66.04,220.98 64.14,222.88 TP14.TP
ADC14
  Bottom 0.61: JP169.7 123.19,220.98 121.28,222.88 TP15.TP
GND
  Bottom 0.61: JP8.2 JP9.1 | JP7.3 JP6.1
  pour Bottom (isolate 0.61): 0,39.37 50.8,39.37 50.8,0 0,0
GND1
  Bottom 0.61: JP20.2 JP21.1 | JP19.3 JP18.1
  pour Bottom (isolate 0.61): 57.15,39.37 107.95,39.37 107.95,0 57.15,0
GND2
  Bottom 0.61: JP32.2 JP33.1 | JP31.3 JP30.1
  pour Bottom (isolate 0.61): 114.3,39.37 165.1,39.37 165.1,0 114.3,0
GND3
  Bottom 0.61: JP44.2 JP45.1 | JP43.3 JP42.1
  pour Bottom (isolate 0.61): 0,86.36 50.8,86.36 50.8,46.99 0,46.99
GND4
  Bottom 0.61: JP56.2 JP57.1 | JP55.3 JP54.1
  pour Bottom (isolate 0.61): 57.15,86.36 107.95,86.36 107.95,46.99 57.15,46.99
GND5
  Bottom 0.61: JP68.2 JP69.1 | JP67.3 JP66.1
  pour Bottom (isolate 0.61): 114.3,86.36 165.1,86.36 165.1,46.99 114.3,46.99
GND6
  Bottom 0.61: JP80.2 JP81.1 | JP79.3 JP78.1
  pour Bottom (isolate 0.61): 0,133.35 50.8,133.35 50.8,93.98 0,93.98
GND7
  Bottom 0.61: JP92.2 JP93.1 | JP91.3 JP90.1
  pour Bottom (isolate 0.61): 57.15,133.35 107.95,133.35 107.95,93.98 57.15,93.98
GND8
  Bottom 0.61: JP104.2 JP105.1 | JP103.3 JP102.1
  pour Bottom (isolate 0.61): 114.3,133.35 165.1,133.35 165.1,93.98 114.3,93.98
GND9
  Bottom 0.61: JP116.2 JP117.1 | JP115.3 JP114.1
  pour Bottom (isolate 0.61): 0,180.34 50.8,180.34 50.8,140.97 0,140.97
GND10
  Bottom 0.61: JP128.2 JP129.1 | JP127.3 JP126.1
  pour Bottom (isolate 0.61): 57.15,180.34 107.95,180.34 107.95,140.97 57.15,140.97
GND11
  Bottom 0.61: JP140.2 JP141.1 | JP139.3 JP138.1
  pour Bottom (isolate 0.61): 114.3,180.34 165.1,180.34 165.1,140.97 114.3,140.97
GND12
  Bottom 0.61: JP152.2 JP153.1 | JP151.3 JP150.1
  pour Bottom (isolate 0.61): 0,227.33 50.8,227.33 50.8,187.96 0,187.96
GND13
  Bottom 0.61: JP164.2 JP165.1 | JP163.3 JP162.1
  pour Bottom (isolate 0.61): 57.15,227.33 107.95,227.33 107.95,187.96 57.15,187.96
GND14
  Bottom 0.61: JP176.2 JP177.1 | JP175.3 JP174.1
  pour Bottom (isolate 0.61): 114.3,227.33 165.1,227.33 165.1,187.96 114.3,187.96
GPIO0
  Bottom 0.61: R3.1 JP2.5 JP4.3 JP5.1 48.26,25.4 48.89,24.77 48.89,18.41 40.72,10.24 S1.2
GPIO1
  Bottom 0.61: JP13.4 67.31,25.4 66.04,26.67 66.04,29.84 65.41,30.48 63.68,30.48 JP20.1 JP21.2
GPIO2
  Bottom 0.61: JP5.2 JP4.2 JP2.6
GPIO3
  Bottom 0.61: JP13.3 67.95,22.86 65.41,25.4 JP18.3 JP19.1
GPIO4
  Bottom 0.61: JP11.2 JP10.1 44.27,27.94 JP2.4 R2.1
GPIO5
  Bottom 0.61: JP11.1 JP10.2 44.27,30.48 JP2.3 R1.1
GPIO6
  Bottom 0.61: JP19.2 JP18.2 64.77,22.86 67.31,20.32 JP13.2
GPIO7
  Bottom 0.61: JP17.3 JP16.1 JP14.7
GPIO8
  Bottom 0.61: JP17.2 JP16.2 JP14.6
GPIO9
  Bottom 0.61: R7.1 JP14.5 JP16.3 JP17.1 105.41,25.4 106.05,24.77 106.05,18.41 97.87,10.24 S3.2
GPIO10
  Bottom 0.61: JP23.2 JP22.1 101.42,27.94 JP14.4 R6.1
GPIO11
  Bottom 0.61: JP23.1 JP22.2 101.42,30.48 JP14.3 R5.1
GPIO12
  Bottom 0.61: JP1.3 10.79,22.86 8.26,25.4 JP6.3 JP7.1
GPIO13
  Bottom 0.61: JP7.2 JP6.2 7.62,22.86 10.16,20.32 JP1.2
GPIO14
  Bottom 0.61: JP1.4 10.16,25.4 8.89,26.67 8.89,29.84 8.26,30.48 6.53,30.48 JP8.1 JP9.2
GPIO15
  Bottom 0.61: JP5.3 JP4.1 JP2.7
GPIO16
  Bottom 0.61: JP25.4 124.46,25.4 123.19,26.67 123.19,29.84 122.56,30.48 120.83,30.48 JP32.1 JP33.2
GPIO17
  Bottom 0.61: JP25.3 125.09,22.86 122.56,25.4 JP30.3 JP31.1
GPIO18
  Bottom 0.61: JP31.2 JP30.2 121.92,22.86 124.46,20.32 JP25.2
GPIO19
  Bottom 0.61: JP29.3 JP28.1 JP26.7
GPIO20
  Bottom 0.61: JP29.2 JP28.2 JP26.6
GPIO21
  Bottom 0.61: R11.1 JP26.5 JP28.3 JP29.1 162.56,25.4 163.19,24.77 163.19,18.41 155.02,10.24 S5.2
GPIO22
  Bottom 0.61: JP35.2 JP34.1 158.57,27.94 JP26.4 R10.1
GPIO23
  Bottom 0.61: JP35.1 JP34.2 158.57,30.48 JP26.3 R9.1
GPIO24
  Bottom 0.61: JP37.4 10.16,72.39 8.89,73.66 8.89,76.84 8.26,77.47 6.53,77.47 JP44.1 JP45.2
GPIO25
  Bottom 0.61: JP37.3 10.79,69.85 8.26,72.39 JP42.3 JP43.1
GPIO26
  Bottom 0.61: JP43.2 JP42.2 7.62,69.85 10.16,67.31 JP37.2
GPIO27
  Bottom 0.61: JP41.3 JP40.1 JP38.7
GPIO28
  Bottom 0.61: JP41.2 JP40.2 JP38.6
GPIO29
  Bottom 0.61: R15.1 JP38.5 JP40.3 JP41.1 48.26,72.39 48.89,71.75 48.89,65.41 40.72,57.23 S7.2
GPIO30
  Bottom 0.61: JP47.2 JP46.1 44.27,74.93 JP38.4 R14.1
GPIO31
  Bottom 0.61: JP47.1 JP46.2 44.27,77.47 JP38.3 R13.1
GPIO32
  Bottom 0.61: JP49.4 67.31,72.39 66.04,73.66 66.04,76.84 65.41,77.47 63.68,77.47 JP56.1 JP57.2
GPIO33
  Bottom 0.61: JP49.3 67.95,69.85 65.41,72.39 JP54.3 JP55.1
GPIO34
  Bottom 0.61: JP55.2 JP54.2 64.77,69.85 67.31,67.31 JP49.2
GPIO35
  Bottom 0.61: JP53.3 JP52.1 JP50.7
GPIO36
  Bottom 0.61: JP53.2 JP52.2 JP50.6
GPIO37
  Bottom 0.61: R19.1 JP50.5 JP52.3 JP53.1 105.41,72.39 106.05,71.75 106.05,65.41 97.87,57.23 S9.2
GPIO38
  Bottom 0.61: JP59.2 JP58.1 101.42,74.93 JP50.4 R18.1
GPIO39
  Bottom 0.61: JP59.1 JP58.2 101.42,77.47 JP50.3 R17.1
GPIO40
  Bottom 0.61: JP61.4 124.46,72.39 123.19,73.66 123.19,76.84 122.56,77.47 120.83,77.47 JP68.1 JP69.2
GPIO41
  Bottom 0.61: JP61.3 125.09,69.85 122.56,72.39 JP66.3 JP67.1
GPIO42
  Bottom 0.61: JP67.2 JP66.2 121.92,69.85 124.46,67.31 JP61.2
GPIO43
  Bottom 0.61: JP65.3 JP64.1 JP62.7
GPIO44
  Bottom 0.61: JP65.2 JP64.2 JP62.6
GPIO45
  Bottom 0.61: R23.1 JP62.5 JP64.3 JP65.1 162.56,72.39 163.19,71.75 163.19,65.41 155.02,57.23 S11.2
GPIO46
  Bottom 0.61: JP71.2 JP70.1 158.57,74.93 JP62.4 R22.1
GPIO47
  Bottom 0.61: JP71.1 JP70.2 158.57,77.47 JP62.3 R21.1
GPIO48
  Bottom 0.61: JP73.4 10.16,119.38 8.89,120.65 8.89,123.83 8.26,124.46 6.53,124.46 JP80.1 JP81.2
GPIO49
  Bottom 0.61: JP73.3 10.79,116.84 8.26,119.38 JP78.3 JP79.1
GPIO50
  Bottom 0.61: JP79.2 JP78.2 7.62,116.84 10.16,114.3 JP73.2
GPIO51
  Bottom 0.61: JP77.3 JP76.1 JP74.7
GPIO52
  Bottom 0.61: JP77.2 JP76.2 JP74.6
GPIO53
  Bottom 0.61: R27.1 JP74.5 JP76.3 JP77.1 48.26,119.38 48.89,118.75 48.89,112.39 40.72,104.22 S13.2
GPIO54
  Bottom 0.61: JP83.2 JP82.1 44.27,121.92 JP74.4 R26.1
GPIO55
  Bottom 0.61: JP83.1 JP82.2 44.27,124.46 JP74.3 R25.1
GPIO56
  Bottom 0.61: JP85.4 67.31,119.38 66.04,120.65 66.04,123.83 65.41,124.46 63.68,124.46 JP92.1 JP93.2
GPIO57
  Bottom 0.61: JP85.3 67.95,116.84 65.41,119.38 JP90.3 JP91.1
GPIO58
  Bottom 0.61: JP91.2 JP90.2 64.77,116.84 67.31,114.3 JP85.2
GPIO59
  Bottom 0.61: JP89.3 JP88.1 JP86.7
GPIO60
  Bottom 0.61: JP89.2 JP88.2 JP86.6
GPIO61
  Bottom 0.61: R31.1 JP86.5 JP88.3 JP89.1 105.41,119.38 106.05,118.75 106.05,112.39 97.87,104.22 S15.2
GPIO62
  Bottom 0.61: JP95.2 JP94.1 101.42,121.92 JP86.4 R30.1
GPIO63
  Bottom 0.61: JP95.1 JP94.2 101.42,124.46 JP86.3 R29.1
GPIO64
  Bottom 0.61: JP97.4 124.46,119.38 123.19,120.65 123.19,123.83 122.56,124.46 120.83,124.46 JP104.1 JP105.2
GPIO65
  Bottom 0.61: JP97.3 125.09,116.84 122.56,119.38 JP102.3 JP103.1
GPIO66
  Bottom 0.61: JP103.2 JP102.2 121.92,116.84 124.46,114.3 JP97.2
GPIO67
  Bottom 0.61: JP101.3 JP100.1 JP98.7
GPIO68
  Bottom 0.61: JP101.2 JP100.2 JP98.6
GPIO69
  Bottom 0.61: R35.1 JP98.5 JP100.3 JP101.1 162.56,119.38 163.19,118.75 163.19,112.39 155.02,104.22 S17.2
GPIO70
  Bottom 0.61: JP107.2 JP106.1 158.57,121.92 JP98.4 R34.1
GPIO71
  Bottom 0.61: JP107.1 JP106.2 158.57,124.46 JP98.3 R33.1
GPIO72
  Bottom 0.61: JP109.4 10.16,166.37 8.89,167.64 8.89,170.81 8.26,171.45 6.53,171.45 JP116.1 JP117.2
GPIO73
  Bottom 0.61: JP109.3 10.79,163.83 8.26,166.37 JP114.3 JP115.1
GPIO74
  Bottom 0.61: JP115.2 JP114.2 7.62,163.83 10.16,161.29 JP109.2
GPIO75
  Bottom 0.61: JP113.3 JP112.1 JP110.7
GPIO76
  Bottom 0.61: JP113.2 JP112.2 JP110.6
GPIO77
  Bottom 0.61: R39.1 JP110.5 JP112.3 JP113.1 48.26,166.37 48.89,165.73 48.89,159.38 40.72,151.21 S19.2
GPIO78
  Bottom 0.61: JP119.2 JP118.1 44.27,168.91 JP110.4 R38.1
GPIO79
  Bottom 0.61: JP119.1 JP118.2 44.27,171.45 JP110.3 R37.1
GPIO80
  Bottom 0.61: JP121.4 67.31,166.37 66.04,167.64 66.04,170.81 65.41,171.45 63.68,171.45 JP128.1 JP129.2
GPIO81
  Bottom 0.61: JP121.3 67.95,163.83 65.41,166.37 JP126.3 JP127.1
GPIO82
  Bottom 0.61: JP127.2 JP126.2 64.77,163.83 67.31,161.29 JP121.2
GPIO83
  Bottom 0.61: JP125.3 JP124.1 JP122.7
GPIO84
  Bottom 0.61: JP125.2 JP124.2 JP122.6
GPIO85
  Bottom 0.61: R43.1 JP122.5 JP124.3 JP125.1 105.41,166.37 106.05,165.73 106.05,159.38 97.87,151.21 S21.2
GPIO86
  Bottom 0.61: JP131.2 JP130.1 101.42,168.91 JP122.4 R42.1
GPIO87
  Bottom 0.61: JP131.1 JP130.2 101.42,171.45 JP122.3 R41.1
GPIO88
  Bottom 0.61: JP133.4 124.46,166.37 123.19,167.64 123.19,170.81 122.56,171.45 120.83,171.45 JP140.1 JP141.2
GPIO89
  Bottom 0.61: JP133.3 125.09,163.83 122.56,166.37 JP138.3 JP139.1
GPIO90
  Bottom 0.61: JP139.2 JP138.2 121.92,163.83 124.46,161.29 JP133.2
GPIO91
  Bottom 0.61: JP137.3 JP136.1 JP134.7
GPIO92
  Bottom 0.61: JP137.2 JP136.2 JP134.6
GPIO93
  Bottom 0.61: R47.1 JP134.5 JP136.3 JP137.1 162.56,166.37 163.19,165.73 163.19,159.38 155.02,151.21 S23.2
GPIO94
  Bottom 0.61: JP143.2 JP142.1 158.57,168.91 JP134.4 R46.1
GPIO95
  Bottom 0.61: JP143.1 JP142.2 158.57,171.45 JP134.3 R45.1
GPIO96
  Bottom 0.61: JP145.4 10.16,213.36 8.89,214.63 8.89,217.8 8.26,218.44 6.53,218.44 JP152.1 JP153.2
GPIO97
  Bottom 0.61: JP145.3 10.79,210.82 8.26,213.36 JP150.3 JP151.1
GPIO98
  Bottom 0.61: JP151.2 JP150.2 7.62,210.82 10.16,208.28 JP145.2
GPIO99
  Bottom 0.61: JP149.3 JP148.1 JP146.7
GPIO100
  Bottom 0.61: JP149.2 JP148.2 JP146.6
GPIO101
  Bottom 0.61: R51.1 JP146.5 JP148.3 JP149.1 48.26,213.36 48.89,212.72 48.89,206.38 40.72,198.2 S25.2
GPIO102
  Bottom 0.61: JP155.2 JP154.1 44.27,215.9 JP146.4 R50.1
GPIO103
  Bottom 0.61: JP155.1 JP154.2 44.27,218.44 JP146.3 R49.1
GPIO104
  Bottom 0.61: JP157.4 67.31,213.36 66.04,214.63 66.04,217.8 65.41,218.44 63.68,218.44 JP164.1 JP165.2
GPIO105
  Bottom 0.61: JP157.3 67.95,210.82 65.41,213.36 JP162.3 JP163.1
GPIO106
  Bottom 0.61: JP163.2 JP162.2 64.77,210.82 67.31,208.28 JP157.2
GPIO107
  Bottom 0.61: JP161.3 JP160.1 JP158.7
GPIO108
  Bottom 0.61: JP161.2 JP160.2 JP158.6
GPIO109
  Bottom 0.61: R55.1 JP158.5 JP160.3 JP161.1 105.41,213.36 106.05,212.72 106.05,206.38 97.87,198.2 S27.2
GPIO110
  Bottom 0.61: JP167.2 JP166.1 101.42,215.9 JP158.4 R54.1
GPIO111
  Bottom 0.61: JP167.1 JP166.2 101.42,218.44 JP158.3 R53.1
GPIO112
  Bottom 0.61: JP169.4 124.46,213.36 123.19,214.63 123.19,217.8 122.56,218.44 120.83,218.44 JP176.1 JP177.2
GPIO113
  Bottom 0.61: JP169.3 125.09,210.82 122.56,213.36 JP174.3 JP175.1
GPIO114
  Bottom 0.61: JP175.2 JP174.2 121.92,210.82 124.46,208.28 JP169.2
GPIO115
  Bottom 0.61: JP173.3 JP172.1 JP170.7
GPIO116
  Bottom 0.61: JP173.2 JP172.2 JP170.6
GPIO117
  Bottom 0.61: R59.1 JP170.5 JP172.3 JP173.1 162.56,213.36 163.19,212.72 163.19,206.38 155.02,198.2 S29.2
GPIO118
  Bottom 0.61: JP179.2 JP178.1 158.57,215.9 JP170.4 R58.1
GPIO119
  Bottom 0.61: JP179.1 JP178.2 158.57,218.44 JP170.3 R57.1
REST
  Bottom 0.61: JP1.8 13.33,35.56 14.6,34.29 14.6,29.21 13.33,27.94 | 13.33,27.94 JP1.5 | S2.4 17.22,10.24 JP3.1 16.51,14.6 16.51,22.86 15.61,23.76 R4.1 14.6,26.67 13.33,27.94
REST1
  Bottom 0.61: JP13.8 70.48,35.56 71.76,34.29 71.76,29.21 70.48,27.94 | 70.48,27.94 JP13.5 | S4.4 74.37,10.24 JP15.1 73.66,14.6 73.66,22.86 72.76,23.76 R8.1 71.76,26.67 70.48,27.94
REST2
  Bottom 0.61: JP25.8 127.63,35.56 128.91,34.29 128.91,29.21 127.63,27.94 | 127.63,27.94 JP25.5 | S6.4 131.52,10.24 JP27.1 130.81,14.6 130.81,22.86 129.91,23.76 R12.1 128.91,26.67 127.63,27.94
REST3
  Bottom 0.61: JP37.8 13.33,82.55 14.6,81.28 14.6,76.2 13.33,74.93 | 13.33,74.93 JP37.5 | S8.4 17.22,57.23 JP39.1 16.51,61.59 16.51,69.85 15.61,70.75 R16.1 14.6,73.66 13.33,74.93
REST4
  Bottom 0.61: JP49.8 70.48,82.55 71.76,81.28 71.76,76.2 70.48,74.93 | 70.48,74.93 JP49.5 | S10.4 74.37,57.23 JP51.1 73.66,61.59 73.66,69.85 72.76,70.75 R20.1 71.76,73.66 70.48,74.93
REST5
  Bottom 0.61: JP61.8 127.63,82.55 128.91,81.28 128.91,76.2 127.63,74.93 | 127.63,74.93 JP61.5 | S12.4 131.52,57.23 JP63.1 130.81,61.59 130.81,69.85 129.91,70.75 R24.1 128.91,73.66 127.63,74.93
REST6
  Bottom 0.61: JP73.8 13.33,129.54 14.6,128.27 14.6,123.19 13.33,121.92 | 13.33,121.92 JP73.5 | S14.4 17.22,104.22 JP75.1 16.51,108.59 16.51,116.84 15.61,117.74 R28.1 14.6,120.65 13.33,121.92
REST7
  Bottom 0.61: JP85.8 70.48,129.54 71.76,128.27 71.76,123.19 70.48,121.92 | 70.48,121.92 JP85.5 | S16.4 74.37,104.22 JP87.1 73.66,108.59 73.66,116.84 72.76,117.74 R32.1 71.76,120.65 70.48,121.92
REST8
  Bottom 0.61: JP97.8 127.63,129.54 128.91,128.27 128.91,123.19 127.63,121.92 | 127.63,121.92 JP97.5 | S18.4 131.52,104.22 JP99.1 130.81,108.59 130.81,116.84 129.91,117.74 R36.1 128.91,120.65 127.63,121.92
REST9
  Bottom 0.61: JP109.8 13.33,176.53 14.6,175.26 14.6,170.18 13.33,168.91 | 13.33,168.91 JP109.5 | S20.4 17.22,151.21 JP111.1 16.51,155.57 16.51,163.83 15.61,164.73 R40.1 14.6,167.64 13.33,168.91
REST10
  Bottom 0.61: JP121.8 70.48,176.53 71.76,175.26 71.76,170.18 70.48,168.91 | 70.48,168.91 JP121.5 | S22.4 74.37,151.21 JP123.1 73.66,155.57 73.66,163.83 72.76,164.73 R44.1 71.76,167.64 70.48,168.91
REST11
  Bottom 0.61: JP133.8 127.63,176.53 128.91,175.26 128.91,170.18 127.63,168.91 | 127.63,168.91 JP133.5 | S24.4 131.52,151.21 JP135.1 130.81,155.57 130.81,163.83 129.91,164.73 R48.1 128.91,167.64 127.63,168.91
REST12
  Bottom 0.61: JP145.8 13.33,223.52 14.6,222.25 14.6,217.17 13.33,215.9 | 13.33,215.9 JP145.5 | S26.4 17.22,198.2 JP147.1 16.51,202.56 16.51,210.82 15.61,211.72 R52.1 14.6,214.63 13.33,215.9
REST13
  Bottom 0.61: JP157.8 70.48,223.52 71.76,222.25 71.76,217.17 70.48,215.9 | 70.48,215.9 JP157.5 | S28.4 74.37,198.2 JP159.1 73.66,202.56 73.66,210.82 72.76,211.72 R56.1 71.76,214.63 70.48,215.9
REST14
  Bottom 0.61: JP169.8 127.63,223.52 128.91,222.25 128.91,217.17 127.63,215.9 | 127.63,215.9 JP169.5 | S30.4 131.52,198.2 JP171.1 130.81,202.56 130.81,210.82 129.91,211.72 R60.1 128.91,214.63 127.63,215.9
RXD
  Bottom 0.61: JP3.3 24.77,12.06 31.75,19.05 31.75,31.75 33.02,33.02 JP2.2
RXD1
  Bottom 0.61: JP15.3 81.92,12.06 88.9,19.05 88.9,31.75 90.17,33.02 JP14.2
RXD2
  Bottom 0.61: JP27.3 139.06,12.06 146.05,19.05 146.05,31.75 147.32,33.02 JP26.2
RXD3
  Bottom 0.61: JP39.3 24.77,59.06 31.75,66.04 31.75,78.74 33.02,80.01 JP38.2
RXD4
  Bottom 0.61: JP51.3 81.92,59.06 88.9,66.04 88.9,78.74 90.17,80.01 JP50.2
RXD5
  Bottom 0.61: JP63.3 139.06,59.06 146.05,66.04 146.05,78.74 147.32,80.01 JP62.2
RXD6
  Bottom 0.61: JP75.3 24.77,106.05 31.75,113.03 31.75,125.73 33.02,127 JP74.2
RXD7
  Bottom 0.61: JP87.3 81.92,106.05 88.9,113.03 88.9,125.73 90.17,127 JP86.2
RXD8
  Bottom 0.61: JP99.3 139.06,106.05 146.05,113.03 146.05,125.73 147.32,127 JP98.2
RXD9
  Bottom 0.61: JP111.3 24.77,153.03 31.75,160.02 31.75,172.72 33.02,173.99 JP110.2
RXD10
  Bottom 0.61: JP123.3 81.92,153.03 88.9,160.02 88.9,172.72 90.17,173.99 JP122.2
RXD11
  Bottom 0.61: JP135.3 139.06,153.03 146.05,160.02 146.05,172.72 147.32,173.99 JP134.2
RXD12
  Bottom 0.61: JP147.3 24.77,200.02 31.75,207.01 31.75,219.71 33.02,220.98 JP146.2
RXD13
  Bottom 0.61: JP159.3 81.92,200.02 88.9,207.01 88.9,219.71 90.17,220.98 JP158.2
RXD14
  Bottom 0.61: JP171.3 139.06,200.02 146.05,207.01 146.05,219.71 147.32,220.98 JP170.2
TXD
  Bottom 0.61: JP3.2 21.59,12.7 22.86,13.97 24.77,13.97 30.48,19.69 30.48,32.39 33.65,35.56 JP2.1
TXD1
  Bottom 0.61: JP15.2 78.74,12.7 80.01,13.97 81.92,13.97 87.63,19.69 87.63,32.39 90.81,35.56 JP14.1
TXD2
  Bottom 0.61: JP27.2 135.89,12.7 137.16,13.97 139.06,13.97 144.78,19.69 144.78,32.39 147.96,35.56 JP26.1
TXD3
  Bottom 0.61: JP39.2 21.59,59.69 22.86,60.96 24.77,60.96 30.48,66.67 30.48,79.38 33.65,82.55 JP38.1
TXD4
  Bottom 0.61: JP51.2 78.74,59.69 80.01,60.96 81.92,60.96 87.63,66.67 87.63,79.38 90.81,82.55 JP50.1
TXD5
  Bottom 0.61: JP63.2 135.89,59.69 137.16,60.96 139.06,60.96 144.78,66.67 144.78,79.38 147.96,82.55 JP62.1
TXD6
  Bottom 0.61: JP75.2 21.59,106.68 22.86,107.95 24.77,107.95 30.48,113.67 30.48,126.36 33.65,129.54 JP74.1
TXD7
  Bottom 0.61: JP87.2 78.74,106.68 80.01,107.95 81.92,107.95 87.63,113.67 87.63,126.36 90.81,129.54 JP86.1
TXD8
  Bottom 0.61: JP99.2 135.89,106.68 137.16,107.95 139.06,107.95 144.78,113.67 144.78,126.36 147.96,129.54 JP98.1
TXD9
  Bottom 0.61: JP111.2 21.59,153.67 22.86,154.94 24.77,154.94 30.48,160.66 30.48,173.35 33.65,176.53 JP110.1
TXD10
  Bottom 0.61: JP123.2 78.74,153.67 80.01,154.94 81.92,154.94 87.63,160.66 87.63,173.35 90.81,176.53 JP122.1
TXD11
  Bottom 0.61: JP135.2 135.89,153.67 137.16,154.94 139.06,154.94 144.78,160.66 144.78,173.35 147.96,176.53 JP134.1
TXD12
  Bottom 0.61: JP147.2 21.59,200.66 22.86,201.93 24.77,201.93 30.48,207.64 30.48,220.34 33.65,223.52 JP146.1
TXD13
  Bottom 0.61: JP159.2 78.74,200.66 80.01,201.93 81.92,201.93 87.63,207.64 87.63,220.34 90.81,223.52 JP158.1
TXD14
  Bottom 0.61: JP171.2 135.89,200.66 137.16,201.93 139.06,201.93 144.78,207.64 144.78,220.34 147.96,223.52 JP170.1
VCC
  Bottom 0.61: R1.2 R2.2 R3.2 33.39,18.78 26.67,12.06 JP3.4 26.67,8.26 23.49,5.08 JP12.1 20.95,6.98 10.79,6.98 8.89,8.89 8.89,12.06 11.3,14.48 JP1.1 13.33,17.78 14.6,19.05 R4.2
VCC1
  Bottom 0.61: R5.2 R6.2 R7.2 90.54,18.78 83.82,12.06 JP15.4 83.82,8.26 80.65,5.08 JP24.1 78.11,6.98 67.95,6.98 66.04,8.89 66.04,12.06 68.45,14.48 JP13.1 70.48,17.78 71.76,19.05 R8.2
VCC2
  Bottom 0.61: R9.2 R10.2 R11.2 147.69,18.78 140.97,12.06 JP27.4 140.97,8.26 137.8,5.08 JP36.1 135.25,6.98 125.09,6.98 123.19,8.89 123.19,12.06 125.6,14.48 JP25.1 127.63,17.78 128.91,19.05 R12.2
VCC3
  Bottom 0.61: R13.2 R14.2 R15.2 33.39,65.78 26.67,59.06 JP39.4 26.67,55.25 23.49,52.07 JP48.1 20.95,53.98 10.79,53.98 8.89,55.88 8.89,59.06 11.3,61.47 JP37.1 13.33,64.77 14.6,66.04 R16.2
VCC4
  Bottom 0.61: R17.2 R18.2 R19.2 90.54,65.78 83.82,59.06 JP51.4 83.82,55.25 80.65,52.07 JP60.1 78.11,53.98 67.95,53.98 66.04,55.88 66.04,59.06 68.45,61.47 JP49.1 70.48,64.77 71.76,66.04 R20.2
VCC5
  Bottom 0.61: R21.2 R22.2 R23.2 147.69,65.78 140.97,59.06 JP63.4 140.97,55.25 137.8,52.07 JP72.1 135.25,53.98 125.09,53.98 123.19,55.88 123.19,59.06 125.6,61.47 JP61.1 127.63,64.77 128.91,66.04 R24.2
VCC6
  Bottom 0.61: R25.2 R26.2 R27.2 33.39,112.77 26.67,106.05 JP75.4 26.67,102.23 23.49,99.06 JP84.1 20.95,100.97 10.79,100.97 8.89,102.87 8.89,106.05 11.3,108.46 JP73.1 13.33,111.76 14.6,113.03 R28.2
VCC7
  Bottom 0.61: R29.2 R30.2 R31.2 90.54,112.77 83.82,106.05 JP87.4 83.82,102.23 80.65,99.06 JP96.1 78.11,100.97 67.95,100.97 66.04,102.87 66.04,106.05 68.45,108.46 JP85.1 70.48,111.76 71.76,113.03 R32.2
VCC8
  Bottom 0.61: R33.2 R34.2 R35.2 147.69,112.77 140.97,106.05 JP99.4 140.97,102.23 137.8,99.06 JP108.1 135.25,100.97 125.09,100.97 123.19,102.87 123.19,106.05 125.6,108.46 JP97.1 127.63,111.76 128.91,113.03 R36.2
VCC9
  Bottom 0.61: R37.2 R38.2 R39.2 33.39,159.75 26.67,153.03 JP111.4 26.67,149.22 23.49,146.05 JP120.1 20.95,147.95 10.79,147.95 8.89,149.86 8.89,153.03 11.3,155.45 JP109.1 13.33,158.75 14.6,160.02 R40.2
VCC10
  Bottom 0.61: R41.2 R42.2 R43.2 90.54,159.75 83.82,153.03 JP123.4 83.82,149.22 80.65,146.05 JP132.1 78.11,147.95 67.95,147.95 66.04,149.86 66.04,153.03 68.45,155.45 JP121.1 70.48,158.75 71.76,160.02 R44.2
VCC11
  Bottom 0.61: R45.2 R46.2 R47.2 147.69,159.75 140.97,153.03 JP135.4 140.97,149.22 137.8,146.05 JP144.1 135.25,147.95 125.09,147.95 123.19,149.86 123.19,153.03 125.6,155.45 JP133.1 127.63,158.75 128.91,160.02 R48.2
VCC12
  Bottom 0.61: R49.2 R50.2 R51.2 33.39,206.74 26.67,200.02 JP147.4 26.67,196.21 23.49,193.04 JP156.1 20.95,194.94 10.79,194.94 8.89,196.85 8.89,200.02 11.3,202.44 JP145.1 13.33,205.74 14.6,207.01 R52.2
VCC13
  Bottom 0.61: R53.2 R54.2 R55.2 90.54,206.74 83.82,200.02 JP159.4 83.82,196.21 80.65,193.04 JP168.1 78.11,194.94 67.95,194.94 66.04,196.85 66.04,200.02 68.45,202.44 JP157.1 70.48,205.74 71.76,207.01 R56.2
VCC14
  Bottom 0.61: R57.2 R58.2 R59.2 147.69,206.74 140.97,200.02 JP171.4 140.97,196.21 137.8,193.04 JP180.1 135.25,194.94 125.09,194.94 123.19,196.85 123.19,200.02 125.6,202.44 JP169.1 127.63,205.74 128.91,207.01 R60.2

## Text on the board
Bottom: By-KKMC | By-KKMC | By-KKMC | ESP-Stack | ESP-Stack | ESP-Stack | CC-BY-NC | CC-BY-NC | CC-BY-NC | By-KKMC | By-KKMC | By-KKMC | ESP-Stack | ESP-Stack | ESP-Stack | CC-BY-NC | CC-BY-NC | CC-BY-NC | By-KKMC | By-KKMC | By-KKMC | ESP-Stack | ESP-Stack | ESP-Stack | CC-BY-NC | CC-BY-NC | CC-BY-NC | By-KKMC | By-KKMC | By-KKMC | ESP-Stack | ESP-Stack | ESP-Stack | CC-BY-NC | CC-BY-NC | CC-BY-NC | By-KKMC | By-KKMC | By-KKMC | ESP-Stack | ESP-Stack | ESP-Stack | CC-BY-NC | CC-BY-NC | CC-BY-NC